# EAGLE board shield_p2_v9 (EAGLE 7.2.0)
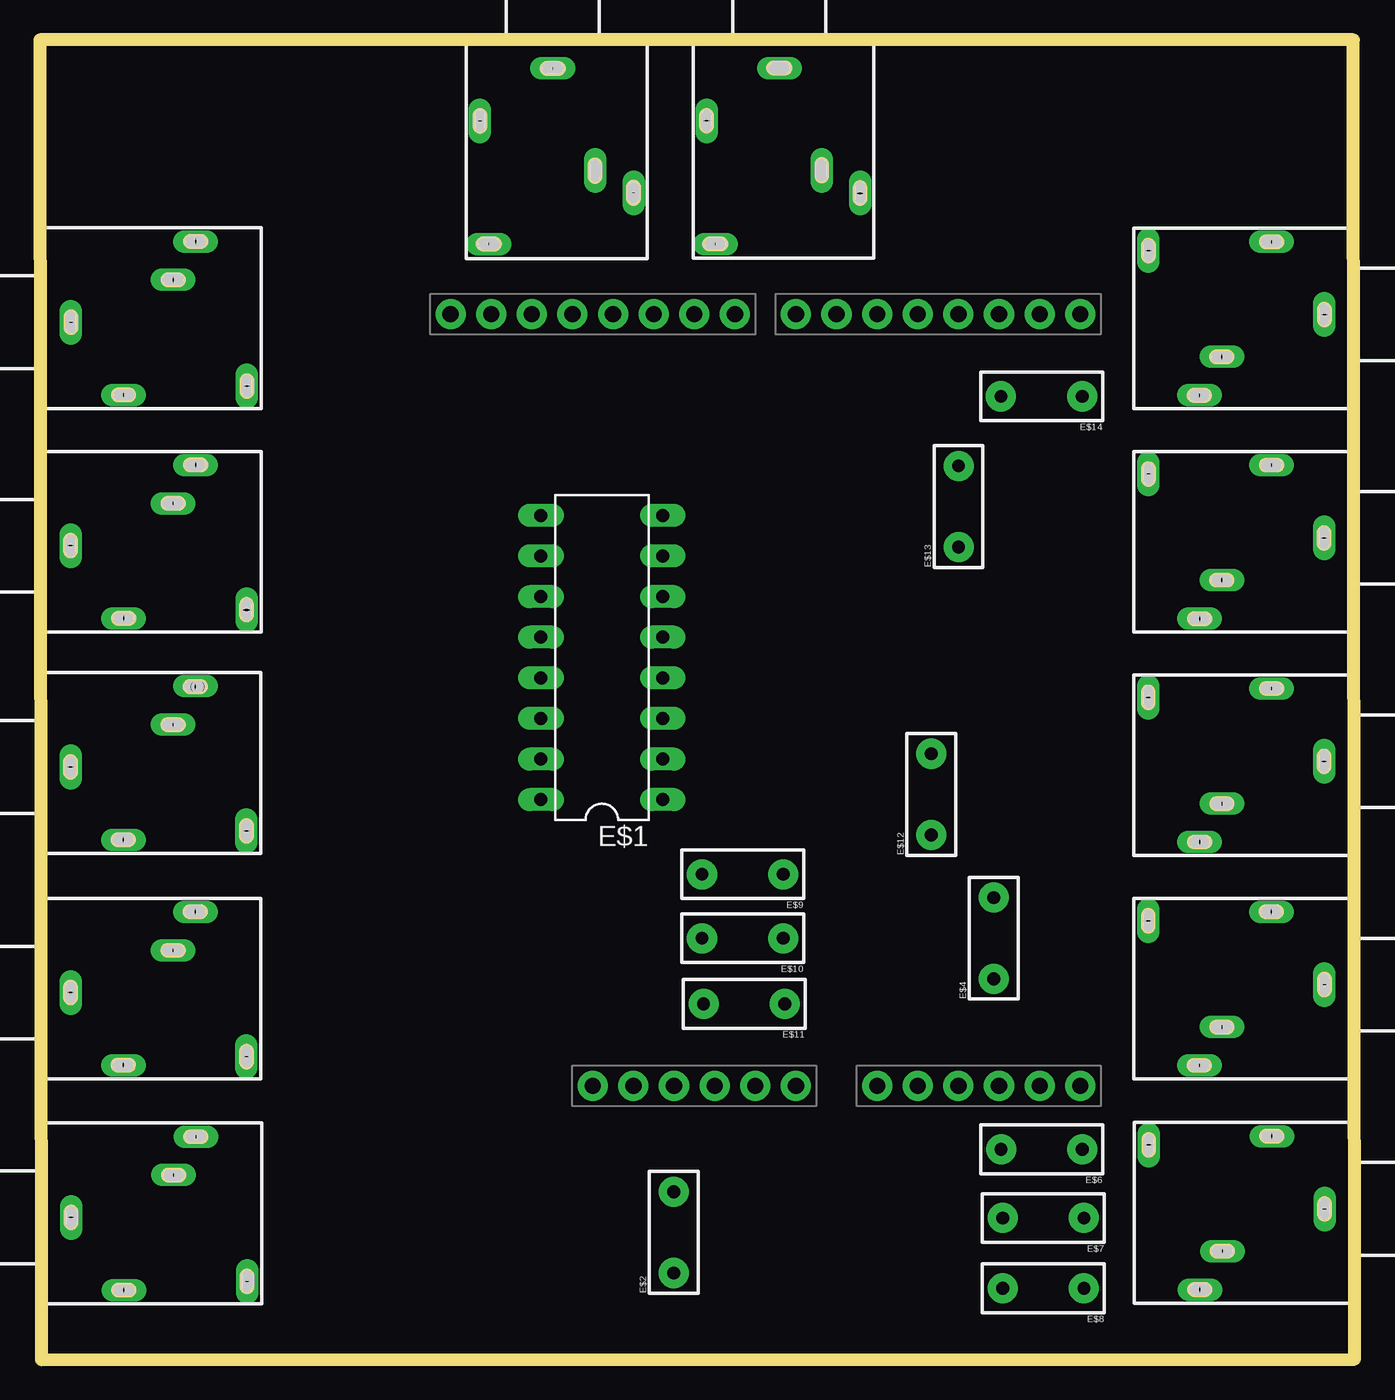
[diagram p0: board, top side]
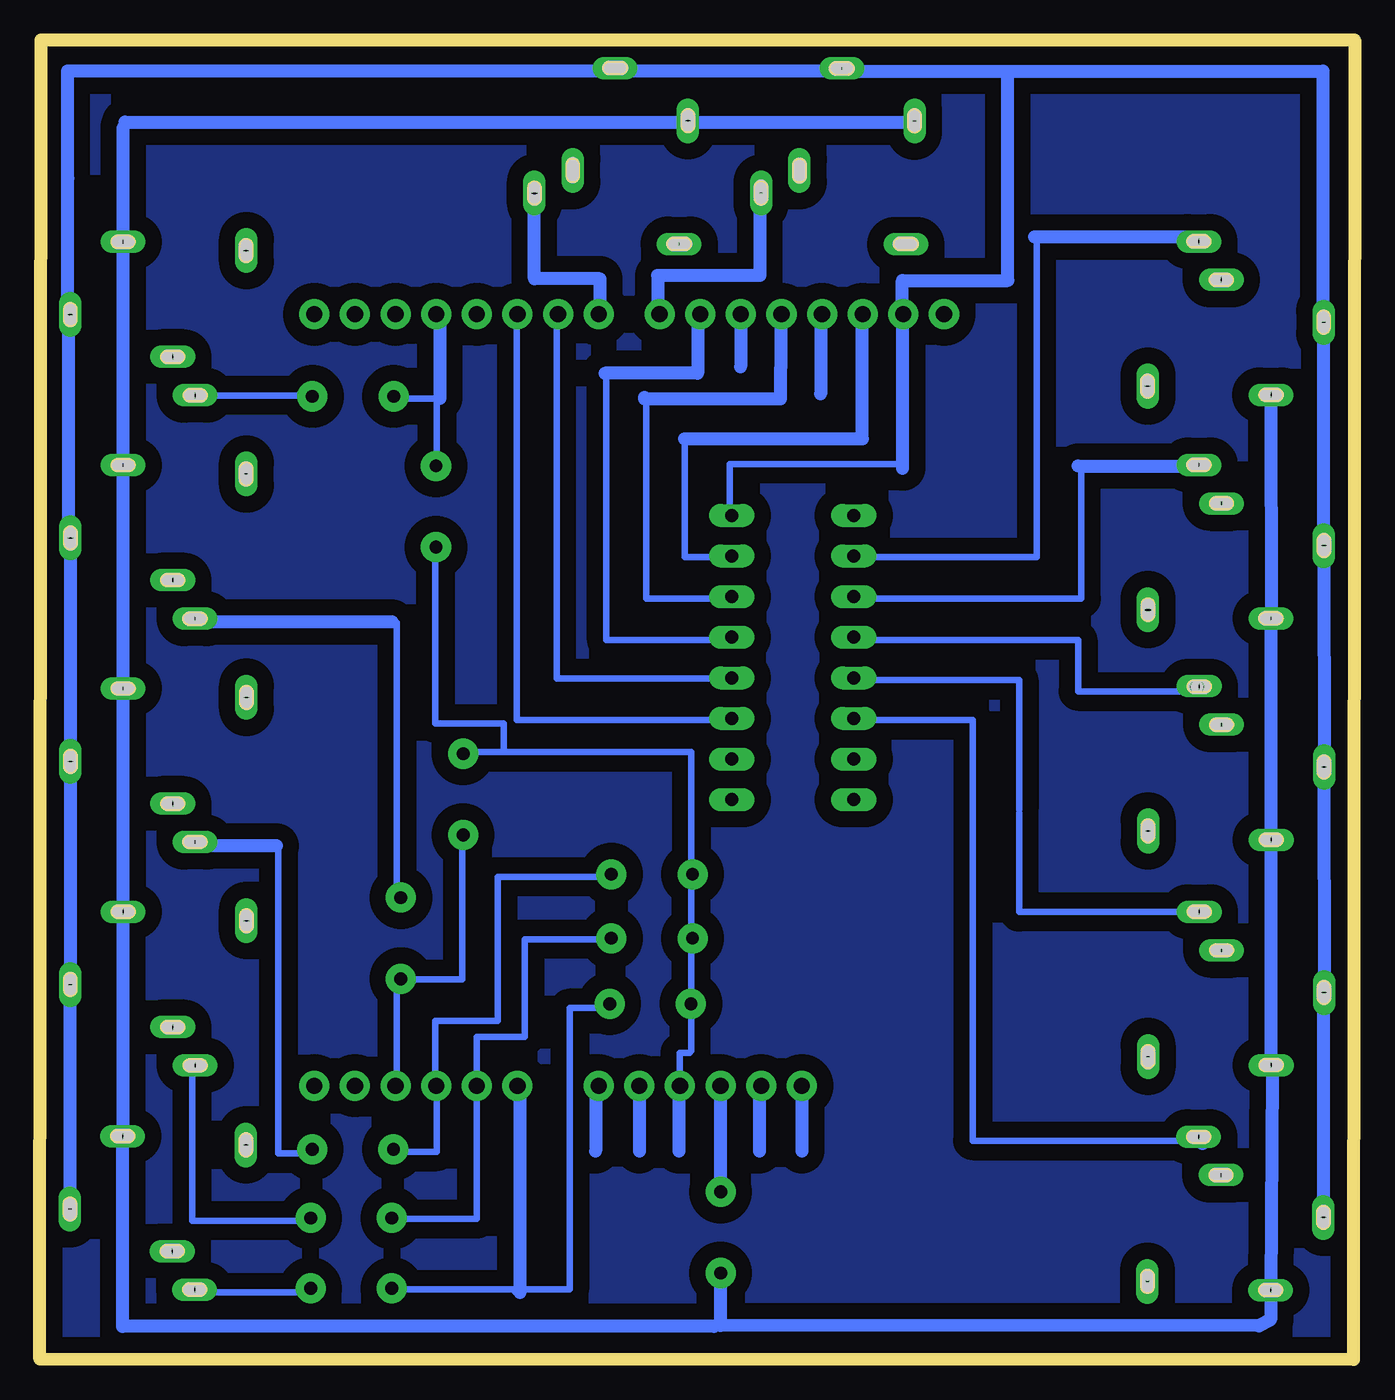
[diagram p1: board, bottom side, seen from below]

Size 82.19 x 82.53 mm. Coordinates in mm from the lower left corner, seen from the top.
Outline: 0.08,0 82.19,0.03 82.12,82.53 0,82.53 0.08,0
Copper layers (1*16): Top 0.035mm / dielectric 1.5mm / Bottom 0.035mm
Design rules "SparkFun": minimum track width 8mil, minimum drill 20mil, track to track 8mil, track to pad 8mil, pad to pad 8mil, via to via 8mil, smd to smd 8mil, copper to edge 8mil, drill to drill 8mil, minimum pad ring 12mil, minimum via ring 10mil, stop-mask expansion 4mil, vias tented up to drill 20mil, thermal gap 10mil
Holes 0.8 mm at 1.93,65.03 1.93,65.2 1.93,65.15 1.93,65.09 1.93,65.01 1.93,64.94 1.93,64.87 1.93,64.8 1.93,64.73 1.93,64.66 1.93,64.59 1.93,64.54 1.92,51.06 1.92,51.23 1.92,51.18 1.92,51.12 1.92,51.04 1.92,50.97 1.92,50.9 1.92,50.83 1.92,50.76 1.92,50.69 1.92,50.62 1.92,50.57 1.9,37.23 1.9,37.4 1.9,37.35 1.9,37.29 1.9,37.21 1.9,37.14 1.9,37.07 1.9,37 1.9,36.93 1.9,36.86 1.9,36.79 1.9,36.74 1.91,23.13 1.91,23.3 1.91,23.25 1.91,23.19 1.91,23.11 1.91,23.04 1.91,22.97 1.91,22.9 1.91,22.83 1.91,22.76 1.91,22.69 1.91,22.64 1.95,9.06 1.95,9.23 1.95,9.18 1.95,9.12 1.95,9.04 1.95,8.97 1.95,8.9 1.95,8.83 1.95,8.76 1.95,8.69 1.95,8.62 1.95,8.57 9.58,69.93 9.41,69.93 9.46,69.93 9.52,69.93 9.6,69.93 9.67,69.93 9.74,69.93 9.81,69.93 9.88,69.93 9.95,69.93 10.02,69.93 10.07,69.93 8.17,67.52 8,67.52 8.05,67.52 8.11,67.52 8.19,67.52 8.26,67.52 8.33,67.52 8.4,67.52 8.47,67.52 8.54,67.52 8.61,67.52 8.66,67.52 9.57,55.95 9.4,55.95 9.45,55.95 9.51,55.95 9.59,55.95 9.66,55.95 9.73,55.95 9.8,55.95 9.87,55.95 9.94,55.95 10.01,55.95 10.06,55.95 8.16,53.55 7.99,53.55 8.04,53.55 8.1,53.55 8.18,53.55 8.25,53.55 8.32,53.55 8.39,53.55 8.46,53.55 8.53,53.55 8.6,53.55 8.65,53.55 9.55,42.09 9.38,42.09 9.43,42.09 9.49,42.09 9.57,42.09 9.64,42.09 9.71,42.09 9.78,42.09 9.92,42.09 9.99,42.09 10.04,42.09 8.16,39.71 7.99,39.71 8.04,39.71 8.1,39.71 8.18,39.71 8.25,39.71 8.32,39.71 8.39,39.71 8.46,39.71 8.53,39.71 8.6,39.71 8.65,39.71 5.05,32.51 4.88,32.51 4.93,32.51 4.99,32.51 5.07,32.51 5.14,32.51 5.21,32.51 5.28,32.51 5.35,32.51 5.42,32.51 5.49,32.51 5.54,32.51 9.55,28 9.38,28 9.43,28 9.49,28 9.57,28 9.64,28 9.71,28 9.78,28 9.85,28 9.92,28 9.99,28 10.04,28 8.16,25.59 7.99,25.59 8.04,25.59 8.1,25.59 8.18,25.59 8.25,25.59 8.32,25.59 8.39,25.59 8.46,25.59 8.53,25.59 8.6,25.59 8.65,25.59 5.04,18.43 4.87,18.43 4.92,18.43 4.98,18.43 5.06,18.43 5.13,18.43 5.2,18.43 5.27,18.43 5.34,18.43 5.41,18.43 5.48,18.43 5.53,18.43 9.59,13.93 9.42,13.93 9.47,13.93 9.53,13.93 9.61,13.93 9.68,13.93 9.75,13.93 9.82,13.93 9.89,13.93 9.96,13.93 10.03,13.93 10.08,13.93 8.19,11.54 8.02,11.54 8.07,11.54 8.13,11.54 8.21,11.54 8.28,11.54 8.35,11.54 8.42,11.54 8.49,11.54 8.56,11.54 8.63,11.54 8.68,11.54 5.08,4.34 4.91,4.34 4.96,4.34 5.02,4.34 5.1,4.34 5.17,4.34 5.24,4.34 5.31,4.34 5.38,4.34 5.45,4.34 5.52,4.34 5.57,4.34 12.95,5.04 12.95,5.21 12.95,5.16 12.95,5.1 12.95,5.02 12.95,4.95 12.95,4.88 12.95,4.81 12.95,4.74 12.95,4.67 12.95,4.6 12.95,4.55 12.91,19.1 12.91,19.27 12.91,19.22 12.91,19.16 12.91,19.08 12.91,19.01 12.91,18.94 12.91,18.87 12.91,18.8 12.91,18.73 12.91,18.66 12.91,18.61 12.91,33.22 12.91,33.39 12.91,33.34 12.91,33.28 12.91,33.2 12.91,33.13 12.91,33.06 12.91,32.99 12.91,32.92 12.91,32.85 12.91,32.78 12.91,32.73 12.92,47.06 12.92,47.18 12.92,47.12 12.92,47.04 12.92,46.97 12.92,46.9 12.92,46.83 12.92,46.76 12.92,46.69 12.92,46.62 12.92,46.57 12.94,61.04 12.94,61.21 12.94,61.16 12.94,61.1 12.94,61.02 12.94,60.95 12.94,60.88 12.94,60.81 12.94,60.74 12.94,60.67 12.94,60.6 12.94,60.55 5.06,60.33 4.89,60.33 4.94,60.33 5,60.33 5.08,60.33 5.15,60.33 5.22,60.33 5.29,60.33 5.36,60.33 5.43,60.33 5.5,60.33 5.55,60.33 5.07,46.35 4.9,46.35 4.95,46.35 5.01,46.35 5.09,46.35 5.16,46.35 5.23,46.35 5.3,46.35 5.37,46.35 5.44,46.35 5.51,46.35 5.56,46.35 69.3,69.52 69.3,69.69 69.3,69.64 69.3,69.58 69.3,69.5 69.3,69.43 69.3,69.36 69.3,69.29 69.3,69.22 69.3,69.15 69.3,69.08 69.3,69.03 69.3,55.55 69.3,55.72 69.3,55.67 69.3,55.61 69.3,55.53 69.3,55.46 69.3,55.39 69.3,55.32 69.3,55.25 69.3,55.18 69.3,55.11 69.3,55.06 69.29,41.57 69.29,41.74 69.29,41.69 69.29,41.63 69.29,41.55 69.29,41.48 69.29,41.41 69.29,41.34 69.29,41.27 69.29,41.2 69.29,41.13 69.29,41.08 69.29,27.6 69.29,27.77 69.29,27.72 69.29,27.66 69.29,27.58 69.29,27.51 69.29,27.44 69.29,27.37 69.29,27.3 69.29,27.23 69.29,27.16 69.29,27.11 69.32,13.58 69.32,13.75 69.32,13.7 69.32,13.64 69.32,13.56 69.32,13.49 69.32,13.42 69.32,13.35 69.32,13.28 69.32,13.21 69.32,13.14 69.32,13.09 72.36,4.37 72.19,4.37 72.24,4.37 72.3,4.37 72.38,4.37 72.45,4.37 72.52,4.37 72.59,4.37 72.66,4.37 72.73,4.37 72.8,4.37 72.85,4.37 73.77,6.78 73.6,6.78 73.65,6.78 73.71,6.78 73.79,6.78 73.86,6.78 73.93,6.78 74,6.78 74.07,6.78 74.14,6.78 74.21,6.78 74.26,6.78 72.33,18.4 72.16,18.4 72.21,18.4 72.27,18.4 72.35,18.4 72.42,18.4 72.49,18.4 72.56,18.4 72.63,18.4 72.7,18.4 72.77,18.4 72.82,18.4 73.74,20.8 73.57,20.8 73.62,20.8 73.68,20.8 73.76,20.8 73.83,20.8 73.9,20.8 73.97,20.8 74.04,20.8 74.11,20.8 74.18,20.8 74.23,20.8 72.34,32.37 72.17,32.37 72.22,32.37 72.28,32.37 72.36,32.37 72.43,32.37 72.5,32.37 72.57,32.37 72.64,32.37 72.71,32.37 72.78,32.37 72.83,32.37 73.74,34.77 73.57,34.77 73.62,34.77 73.68,34.77 73.76,34.77 73.83,34.77 73.9,34.77 73.97,34.77 74.04,34.77 74.11,34.77 74.18,34.77 74.23,34.77 72.34,46.33 72.17,46.33 72.22,46.33 72.28,46.33 72.36,46.33 72.43,46.33 72.5,46.33 72.57,46.33 72.64,46.33 72.71,46.33 72.78,46.33 72.83,46.33 73.73,48.75 73.56,48.75 73.61,48.75 73.67,48.75 73.75,48.75 73.82,48.75 73.89,48.75 73.96,48.75 74.03,48.75 74.1,48.75 74.17,48.75 74.22,48.75 72.33,60.31 72.16,60.31 72.21,60.31 72.27,60.31 72.35,60.31 72.42,60.31 72.49,60.31 72.56,60.31 72.63,60.31 72.7,60.31 72.77,60.31 72.82,60.31 73.73,62.71 73.56,62.71 73.61,62.71 73.67,62.71 73.75,62.71 73.82,62.71 73.89,62.71 73.96,62.71 74.03,62.71 74.1,62.71 74.17,62.71 74.22,62.71 76.84,69.91 76.67,69.91 76.72,69.91 76.78,69.91 76.86,69.91 76.93,69.91 77,69.91 77.07,69.91 77.14,69.91 77.21,69.91 77.28,69.91 77.33,69.91 80.3,65.52 80.3,65.69 80.3,65.64 80.3,65.58 80.3,65.5 80.3,65.43 80.3,65.36 80.3,65.29 80.3,65.22 80.3,65.15 80.3,65.08 80.3,65.03 76.84,55.94 76.67,55.94 76.72,55.94 76.78,55.94 76.86,55.94 76.93,55.94 77,55.94 77.07,55.94 77.14,55.94 77.21,55.94 77.28,55.94 77.33,55.94 80.29,51.54 80.29,51.71 80.29,51.66 80.29,51.6 80.29,51.52 80.29,51.45 80.29,51.38 80.29,51.31 80.29,51.24 80.29,51.17 80.29,51.1 80.29,51.05 76.84,41.97 76.67,41.97 76.72,41.97 76.78,41.97 76.86,41.97 76.93,41.97 77,41.97 77.07,41.97 77.14,41.97 77.21,41.97 77.28,41.97 77.33,41.97 80.29,37.57 80.29,37.74 80.29,37.69 80.29,37.63 80.29,37.55 80.29,37.48 80.29,37.41 80.29,37.34 80.29,37.27 80.29,37.2 80.29,37.13 80.29,37.08 76.83,28 76.66,28 76.71,28 76.77,28 76.85,28 76.92,28 76.99,28 77.06,28 77.13,28 77.2,28 77.27,28 77.32,28 80.3,23.61 80.3,23.78 80.3,23.73 80.3,23.67 80.3,23.59 80.3,23.52 80.3,23.45 80.3,23.38 80.3,23.31 80.3,23.24 80.3,23.17 80.3,23.12 76.86,13.98 76.69,13.98 76.74,13.98 76.8,13.98 76.88,13.98 76.95,13.98 77.02,13.98 77.09,13.98 77.16,13.98 77.23,13.98 77.3,13.98 77.35,13.98 80.32,9.57 80.32,9.74 80.32,9.69 80.32,9.63 80.32,9.55 80.32,9.48 80.32,9.41 80.32,9.34 80.32,9.27 80.32,9.2 80.32,9.13 80.32,9.08 27.51,77.63 27.51,77.8 27.51,77.75 27.51,77.69 27.51,77.61 27.51,77.54 27.51,77.47 27.51,77.4 27.51,77.33 27.51,77.26 27.51,77.19 27.51,77.14 31.87,80.76 31.7,80.76 31.75,80.76 31.81,80.76 31.89,80.76 31.96,80.76 32.03,80.76 32.1,80.76 32.17,80.76 32.24,80.76 32.31,80.76 32.36,80.76 32.43,80.76 34.71,74.56 34.71,74.73 34.71,74.68 34.71,74.62 34.71,74.54 34.71,74.47 34.71,74.4 34.71,74.33 34.71,74.26 34.71,74.19 34.71,74.12 34.71,74.07 34.71,74 28.25,69.77 28.42,69.77 28.37,69.77 28.31,69.77 28.23,69.77 28.16,69.77 28.09,69.77 28.02,69.77 27.95,69.77 27.88,69.77 27.81,69.77 27.76,69.77 27.69,69.77 37.11,73.17 37.11,73.34 37.11,73.29 37.11,73.23 37.11,73.15 37.11,73.08 37.11,73.01 37.11,72.94 37.11,72.87 37.11,72.8 37.11,72.73 37.11,72.68 37.11,72.61 41.68,77.64 41.68,77.81 41.68,77.76 41.68,77.7 41.68,77.62 41.68,77.55 41.68,77.48 41.68,77.41 41.68,77.34 41.68,77.27 41.68,77.2 41.68,77.15 46.04,80.77 45.87,80.77 45.92,80.77 45.98,80.77 46.06,80.77 46.13,80.77 46.2,80.77 46.27,80.77 46.34,80.77 46.41,80.77 46.48,80.77 46.53,80.77 46.6,80.77 48.88,74.57 48.88,74.74 48.88,74.69 48.88,74.63 48.88,74.55 48.88,74.48 48.88,74.41 48.88,74.34 48.88,74.27 48.88,74.2 48.88,74.13 48.88,74.08 48.88,74.01 42.42,69.78 42.59,69.78 42.54,69.78 42.48,69.78 42.4,69.78 42.33,69.78 42.26,69.78 42.19,69.78 42.12,69.78 42.05,69.78 41.98,69.78 41.93,69.78 41.86,69.78 51.28,73.18 51.28,73.24 51.28,73.16 51.28,73.09 51.28,73.02 51.28,72.95 51.28,72.88 51.28,72.81 51.28,72.74 51.28,72.69 51.28,72.62

## Footprints (pad centres in the part's own frame; a part is rotated, then mirrored left to right if it is on the bottom)
DIL16 = drill 0.813 long: 1 -8.89,-3.81; 2 -6.35,-3.81; 3 -3.81,-3.81; 4 -1.27,-3.81; 5 1.27,-3.81; 6 3.81,-3.81; 7 6.35,-3.81; 8 8.89,-3.81; 9 8.89,3.81; 10 6.35,3.81; 11 3.81,3.81; 12 1.27,3.81; 13 -1.27,3.81; 14 -3.81,3.81; 15 -6.35,3.81; 16 -8.89,3.81
PTC = drill 0.8 pad 1.88: P$1 -2.54,0; P$2 2.54,0
1503_09 = drill 0.8 pad 1.2 long: 1 0,-2.1; 2 -4.55,-5.4; 3 5.05,-9.9; 4 -4,-13.1; 5 2.65,-8.5
DUEMILANOVE_VIAS = drill 1.016 pad 1.88: 3.3V 50.8,13.97; 5V 50.8,16.51; A0 50.8,29.21; A1 50.8,31.75; A2 50.8,34.29; A3 50.8,36.83; A4 50.8,39.37; A5 50.8,41.91; AREF 2.54,2.54; D2 2.54,36.83; D3 2.54,34.29; D4 2.54,31.75; D5 2.54,29.21; D6 2.54,26.67; D7 2.54,24.13; D8 2.54,20.32; D9 2.54,17.78; D10 2.54,15.24; D11 2.54,12.7; D12 2.54,10.16; D13 2.54,7.62; GND@0 50.8,19.05; GND@1 50.8,21.59; GND@2 2.54,5.08; RES 50.8,11.43; RX 2.54,41.91; TX 2.54,39.37; VIN 50.8,24.13

## Placement (x,y rotation side)
E$1  [DIL16]  35.13,43.91 90 top
E$2  [PTC]  39.63,7.95 90 top
E$3  [1503_09]  32.06,82.86 0 top
E$4  [PTC]  59.63,26.35 90 top
E$5  [1503_09]  46.23,82.87 0 top
E$6  [PTC]  62.63,13.15 180 top
E$7  [PTC]  62.73,8.85 180 top
E$8  [PTC]  62.73,4.45 180 top
E$9  [PTC]  43.93,30.35 180 top
E$10  [PTC]  43.93,26.35 180 top
E$11  [PTC]  44.03,22.25 180 top
E$12  [PTC]  55.73,35.35 90 top
E$13  [PTC]  57.43,53.35 90 top
E$14  [PTC]  62.62,60.24 180 top
U1  ARDUINO_SHIELDNO_SILK  [DUEMILANOVE_VIAS]  23.13,67.92 270 top
X1  1503_09  [1503_09]  -0.19,22.95 90 top
X2  1503_09  [1503_09]  -0.19,37.06 90 top
X3  1503_09  [1503_09]  -0.18,50.9 90 top
X4  1503_09  [1503_09]  -0.17,64.88 90 top
X5  1503_09  [1503_09]  -0.15,8.89 90 top
X6  1503_09  [1503_09]  82.42,9.42 270 top
X7  1503_09  [1503_09]  82.39,23.45 270 top
X8  1503_09  [1503_09]  82.39,37.42 270 top
X9  1503_09  [1503_09]  82.39,51.39 270 top
X10  1503_09  [1503_09]  82.39,65.36 270 top

## Library data of the parts
E$1 = uln-udn
E$2 E$4 E$6-E$14 U1 = SparkFun
E$3 E$5 = con-lumberg
X1-X10 = con-lumberg; OC_FARNELL: 1243244; OC_NEWARK: unknown

## Nets
N$1: U1.A0
N$2: X7.3
N$3: U1.A2
N$4: X9.3
N$5: U1.D3
N$7: U1.D6
N$8: X1.2 X2.2 X3.2 X4.2 X5.2
N$10: U1.D9
N$11: U1.D13
S$20: U1.A3
S$21: X6.2 X7.2 X8.2 X9.2
S$22: U1.5V
S$23: X5.3
S$43: X1.1 X2.1 X3.1 X4.1 X5.1
S$45: X6.1 X7.1 X8.1 X9.1 X10.1
S$50: X8.3
S$60: U1.A1
S$63: X6.3
S$74: X10.3

## Tracks (layer width: path | path; a pad name or v marks a point on that pad's centre or on a via)
N$1
  Bottom 0.813: U1.A0 52.19,17.12 52.19,4.2
N$2
  Bottom 0.813: 72.47,18.13 72.49,18.13 X7.3
N$3
  Bottom 0.813: U1.A2 57.19,17.12
N$4
  Bottom 0.813: 60.19,46.13 72.49,46.13 X9.3
N$5
  Bottom 0.813: U1.D3 57.19,65.38 57.19,60.13
N$7
  Bottom 0.813: U1.D6 49.83,65.38
N$8
  Bottom 0.813: X4.2 X3.2 X2.2 | X2.2 5.24,32.51 | X2.2 X1.2 5.19,17.92 5.16,17.92 X5.2 5.25,2.49 5.96,2.11 39.64,2.13 39.69,2.13
N$10
  Bottom 0.813: U1.D9 40.87,65.38
N$11
  Bottom 0.813: U1.D13 31.19,65.38 30.99,65.38
S$1
  Bottom 0.406: 38.98,42.59 49.88,42.59 49.88,65.19
S$2
  Bottom 0.406: 9.98,27.99 20.98,27.99 20.98,34.19
S$3
  Bottom 0.813: 10.05,27.88 9.95,27.88
S$4
  Bottom 0.813: 9.59,42.09 9.59,41.9
S$6
  Bottom 0.813: 9.86,55.74 9.86,55.65
S$7
  Bottom 0.406: 39.08,50.19 41.88,50.19 41.88,57.59
  Bottom 0.813: 41.88,57.59 30.78,57.59 30.78,65.29
S$8
  Bottom 0.813: 28.25,55.74 28.25,65.18
S$9
  Bottom 0.813: 10.5,70.21 20.01,70.21
S$10
  Bottom 0.406: 39.08,47.59 44.28,47.59 44.28,59.89
S$11
  Bottom 0.813: 33.37,65.18 33.28,65.18
S$12
  Bottom 0.813: 44.38,60.19 44.38,60.09 35.88,60.09 35.88,61.89
S$13
  Bottom 0.813: 35.88,65.19 35.88,61.99
S$15
  Bottom 0.813: 42.06,16.8 42.24,16.8 42.24,13.04
S$16
  Bottom 0.813: 44.89,17.17 44.71,17.17 44.71,13.04
S$17
  Bottom 0.813: 47.54,17.17 47.45,17.17 47.45,13.04
S$18
  Bottom 0.813: 37.12,16.89 37.21,16.89 37.21,13.04
S$19
  Bottom 0.813: 34.47,16.98 34.56,16.98 34.56,13.04
S$20
  Bottom 0.813: U1.A3 60.19,17.12
S$21
  Bottom 0.813: X8.2 X9.2 | X9.2 X7.2 77.02,28 X6.2 77.02,14.22 77.23,14.22 | X9.2 76.98,77.09
S$22
  Bottom 0.813: U1.5V 39.67,17.12 39.67,10.24
S$23
  Bottom 0.813: X5.3 9.62,13.94
S$25
  Bottom 0.406: 31.28,50.19 19.88,50.19 19.88,70.19
S$26
  Bottom 0.813: 38.28,65.39 38.38,65.39 38.38,62.09
S$27
  Bottom 0.406: 38.98,44.99 46.78,44.99 46.78,61.49
S$28
  Bottom 0.406: 31.48,47.59 17.08,47.59 17.08,55.79
S$29
  Bottom 0.406: 31.38,44.99 17.28,44.99 17.28,41.79 9.78,41.79 9.78,41.89
S$30
  Bottom 0.406: 38.88,39.99 52.38,39.99 52.38,65.39
S$31
  Bottom 0.813: 41.08,65.39 41.08,61.69 46.88,61.69
S$32
  Bottom 0.406: 31.28,39.99 23.88,39.99 23.88,13.69 9.88,13.69 9.88,13.59
S$33
  Bottom 0.813: 9.58,42.19 9.58,42.09
S$34
  Bottom 0.813: 39.67,2.15 39.63,2.15 39.63,5.42
S$35
  Bottom 0.406: 31.38,42.49 20.98,42.49 20.98,34.39
S$36
  Bottom 0.406: 28.18,55.99 39.08,55.99 39.08,52.69
S$37
  Bottom 0.813: 33.38,64.79 33.38,60.39
S$38
  Bottom 0.813: 9.5,13.5 9.5,13.68
S$39
  Bottom 0.813: 17.28,55.89 9.68,55.89 9.68,55.99
S$40
  Bottom 0.813: 40.04,2.07 77.03,2.07 77.03,13.84
S$41
  Bottom 0.406: 41.48,19.29 41.48,30.29
S$42
  pour Bottom (isolate 1.016): 82.11,82.52 82.05,-0.29 0.02,-0.29 0.02,82.61
S$43
  Bottom 0.813: X4.1 X3.1 X2.1 1.94,37.06 X1.1 1.95,22.95 X5.1
S$45
  Bottom 0.813: X10.1 80.41,65.36 80.41,65.13 80.41,51.39 X9.1 X8.1 X7.1 | X7.1 80.08,23.45 | X6.1 80.53,9.42 80.29,9.42 X7.1
S$46
  Bottom 0.813: 80.4,65.07 80.44,65.07 80.44,73.88
S$48
  Bottom 0.406: 60.38,46.09 59.88,46.09 59.88,28.49
S$49
  Bottom 0.406: 59.88,23.69 59.88,16.69
S$50
  Bottom 0.813: X8.3 72.41,32.13 67.41,32.13
S$51
  Bottom 0.406: 27.48,77.39 27.48,77.49
  Bottom 0.813: 76.88,77.39 27.48,77.39
S$52
  Bottom 0.813: 32.18,80.59 80.48,80.59 80.48,73.79
S$53
  Bottom 0.813: 31.98,80.59 1.98,80.59 1.98,64.79
S$54
  Bottom 0.406: 28.38,67.49 28.28,67.49
  Bottom 0.813: 21.68,80.49 21.68,67.49 28.28,67.49 28.28,65.39
S$55
  Bottom 0.406: 67.58,31.99 67.28,31.99 67.28,12.89 65.08,12.89 65.08,12.99
S$56
  Bottom 0.813: 47.18,67.59 51.28,67.59 51.28,72.89
S$57
  Bottom 0.813: 47.18,67.49 47.18,65.09
S$58
  Bottom 0.813: 37.18,72.79 37.18,67.79 43.58,67.79 43.58,65.49
S$59
  Bottom 0.406: 60.18,12.99 57.38,12.99 57.38,16.99
S$60
  Bottom 0.813: U1.A1 55.19,17.12
S$61
  Bottom 0.406: 65.48,8.69 72.68,8.69 72.68,18.39
S$62
  Bottom 0.406: 60.38,8.79 54.88,8.79 54.88,16.89
S$63
  Bottom 0.813: 72.65,4.22 72.52,4.22 X6.3
S$64
  Bottom 0.406: 72.68,4.19 65.28,4.19
S$65
  Bottom 0.406: 60.28,4.39 52.18,4.39
S$66
  Bottom 0.406: 46.78,21.99 49.08,21.99 49.08,4.39 52.48,4.39 52.48,4.19
S$67
  Bottom 0.406: 46.48,26.29 51.88,26.29 51.88,20.19 54.88,20.19 54.88,17.39
S$68
  Bottom 0.406: 46.38,30.19 53.58,30.19 53.58,21.19 57.48,21.19 57.48,17.19
S$69
  Bottom 0.406: 60.08,60.09 57.18,60.09
S$70
  Bottom 0.406: 55.78,32.49 55.78,23.79 59.68,23.79
S$71
  Bottom 0.406: 41.58,19.19 42.18,19.19 42.18,17.09
S$72
  Bottom 0.406: 57.38,60.09 57.38,55.79
S$73
  Bottom 0.406: 57.48,50.99 57.48,39.79 53.18,39.79 53.18,37.99 | 55.88,37.99 53.18,37.99 | 53.18,37.99 41.48,37.99 41.48,30.39
S$74
  Bottom 0.813: 72.49,60.13 X10.3
S$75
  Bottom 0.406: 65.28,60.29 72.68,60.29 72.68,60.19